# Altium PCB NORA_V0.01.PcbDoc (part 1 of 3)
Units mm, origin at the board's own origin, x right, y up, seen from the top; angles counter-clockwise.
Board outline 161.42 x 170.81 mm, 2 copper layers (Top Layer, Bottom Layer), stack 1.671 mm thick; 329 components, 221 nets, 903 pads, 560 vias.
Unrouted connection lines stored in the file: 1.
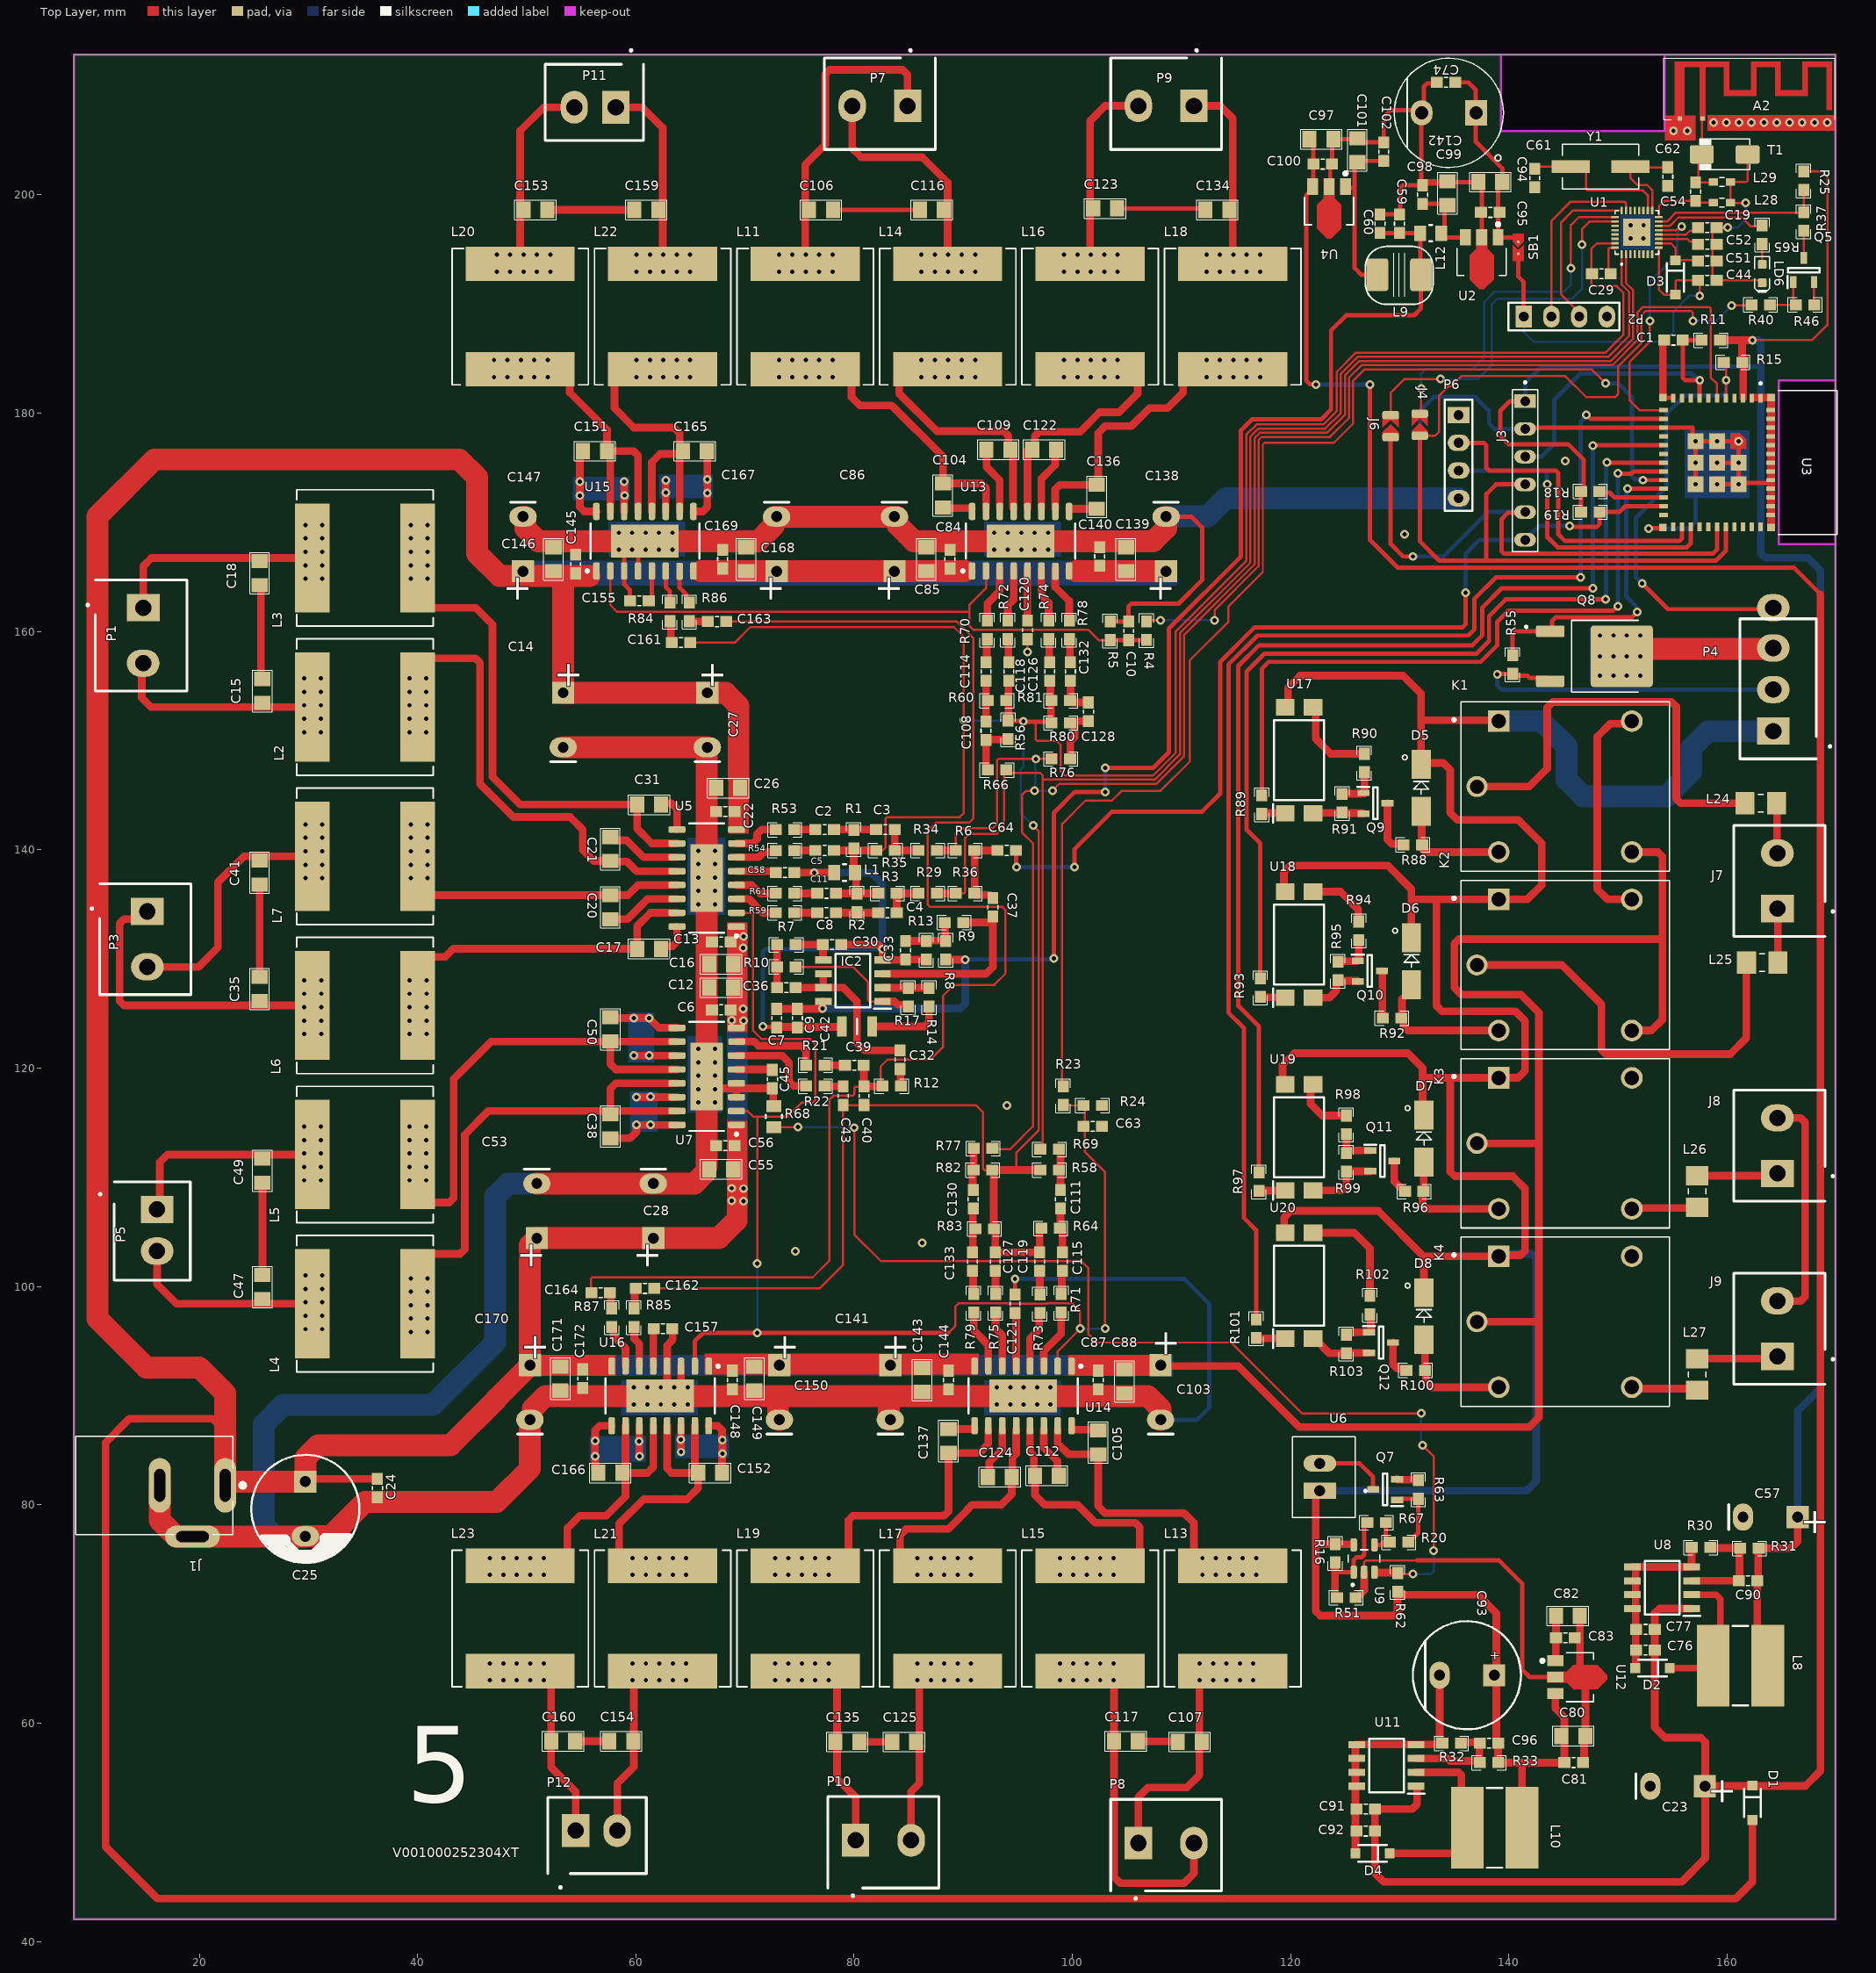
[diagram p0: Top Layer view]
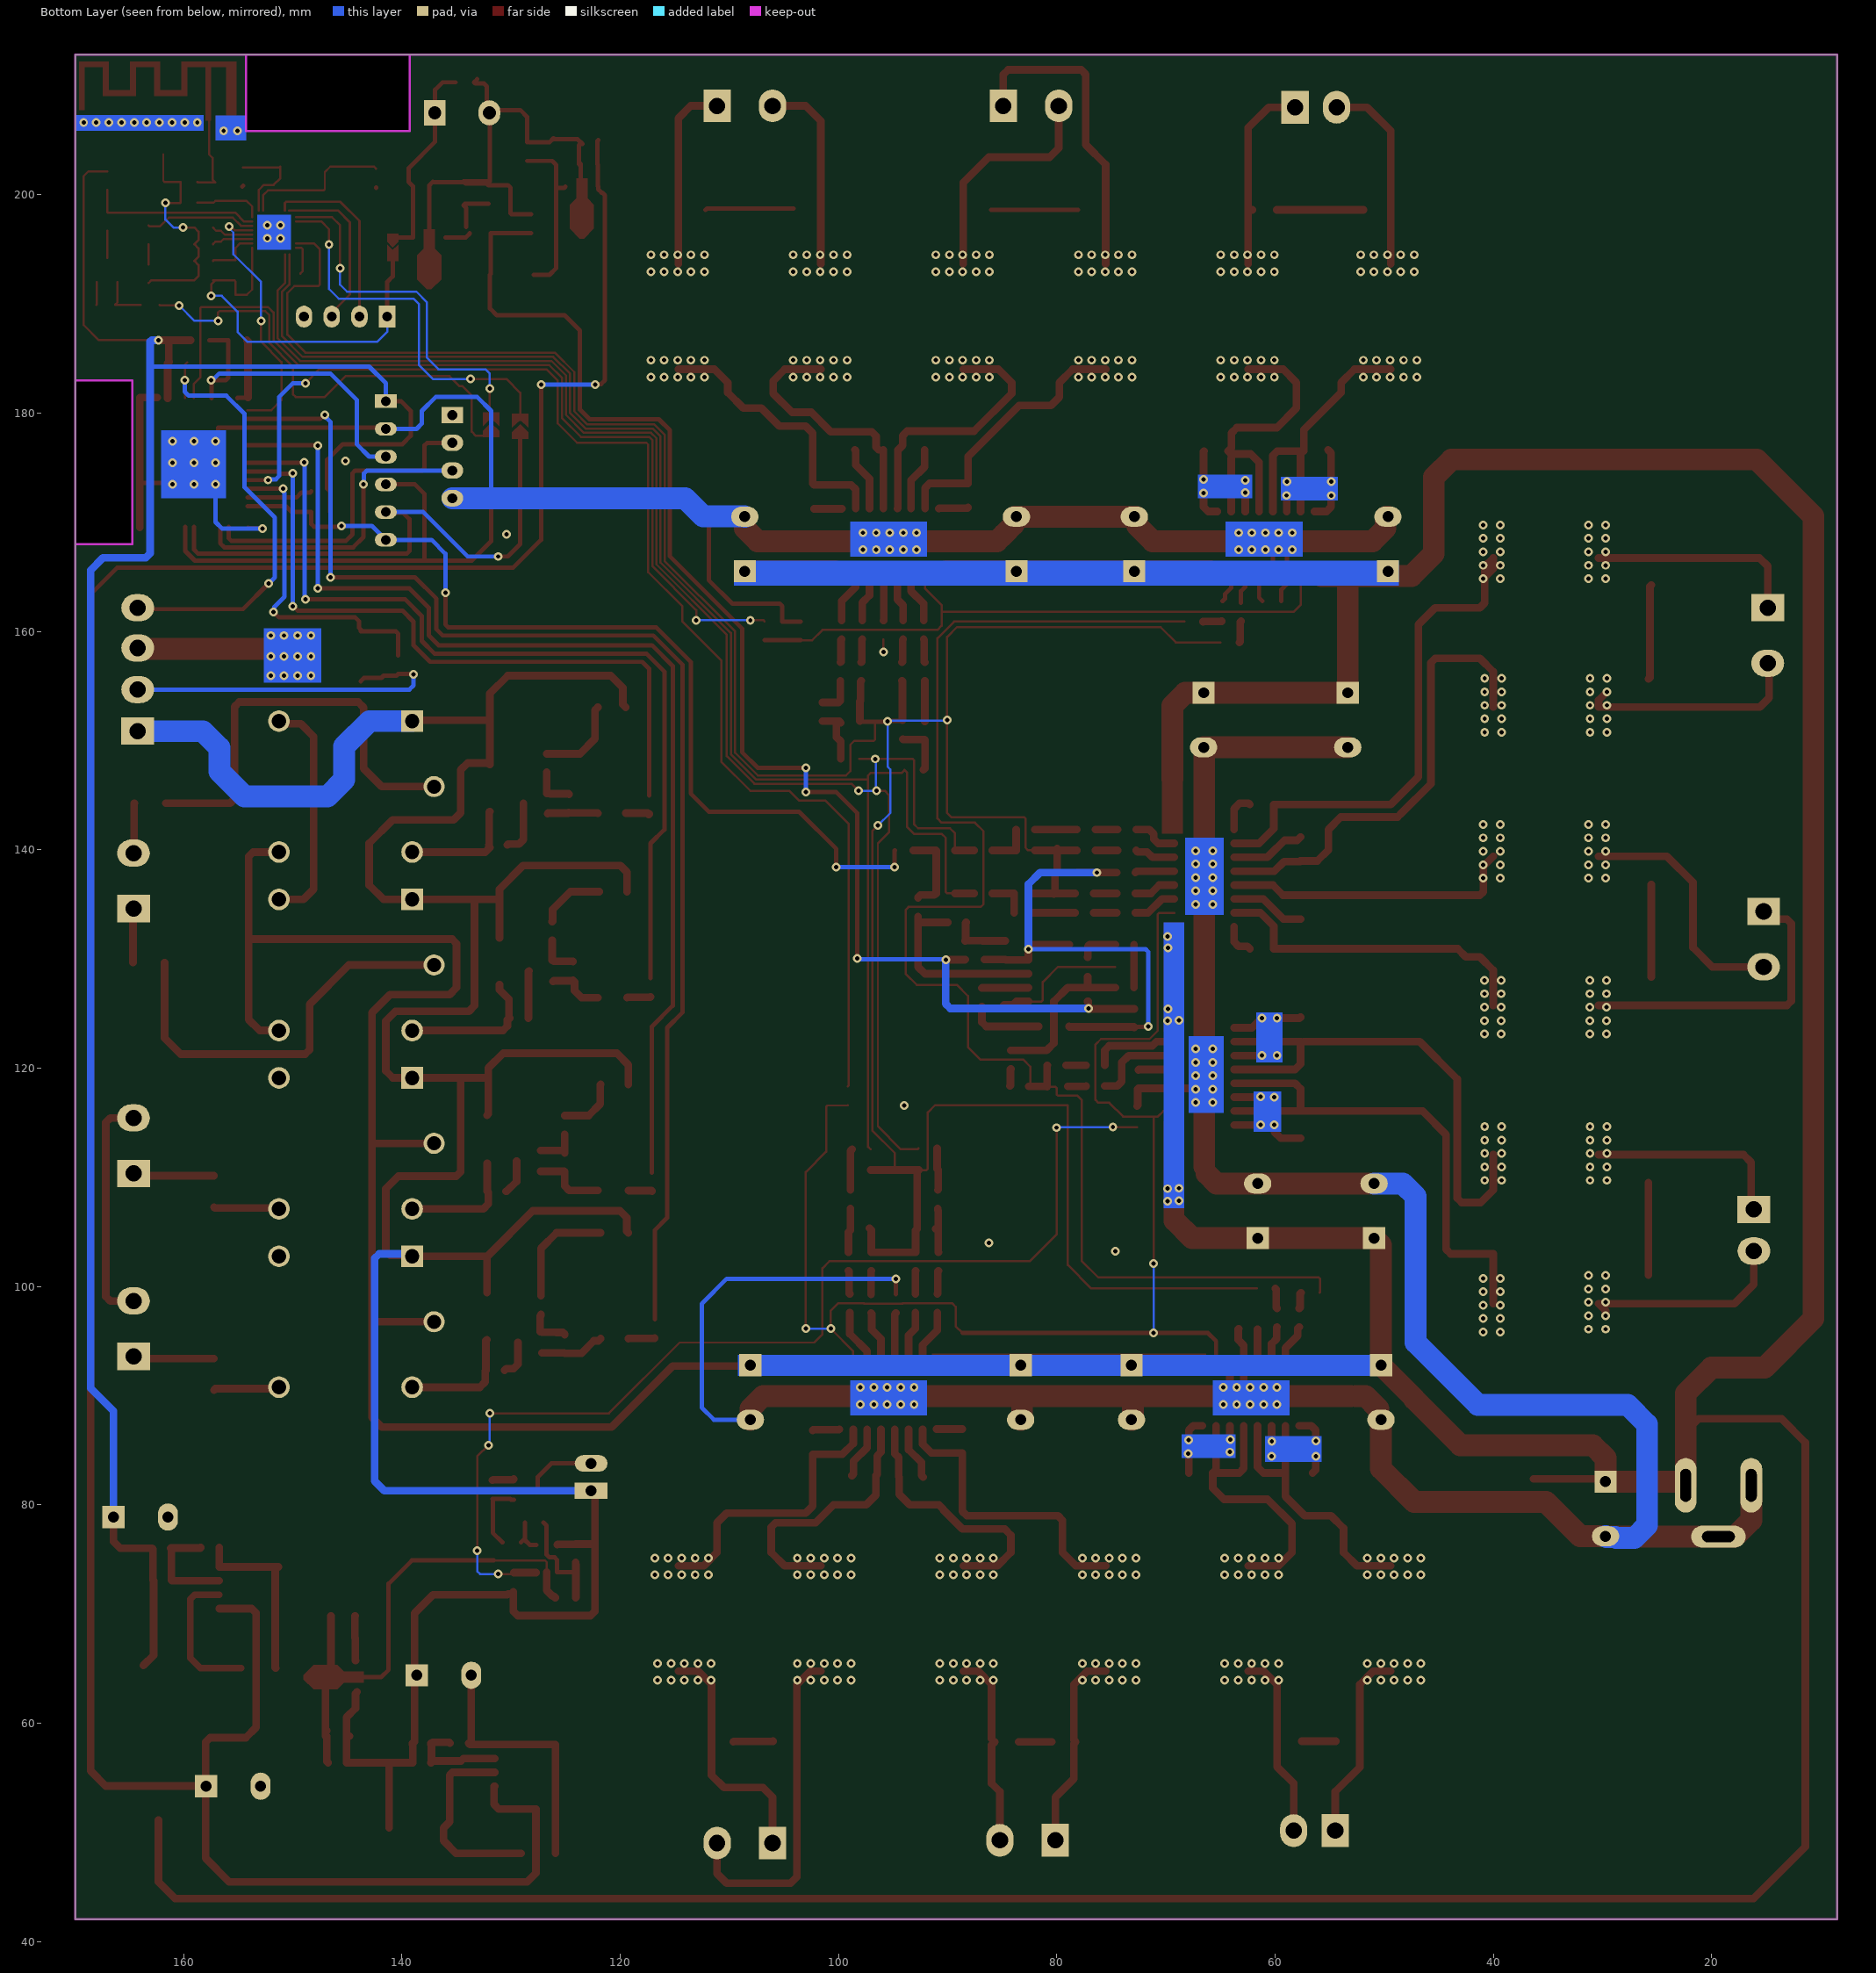
[diagram p1: Bottom Layer view, seen from below]
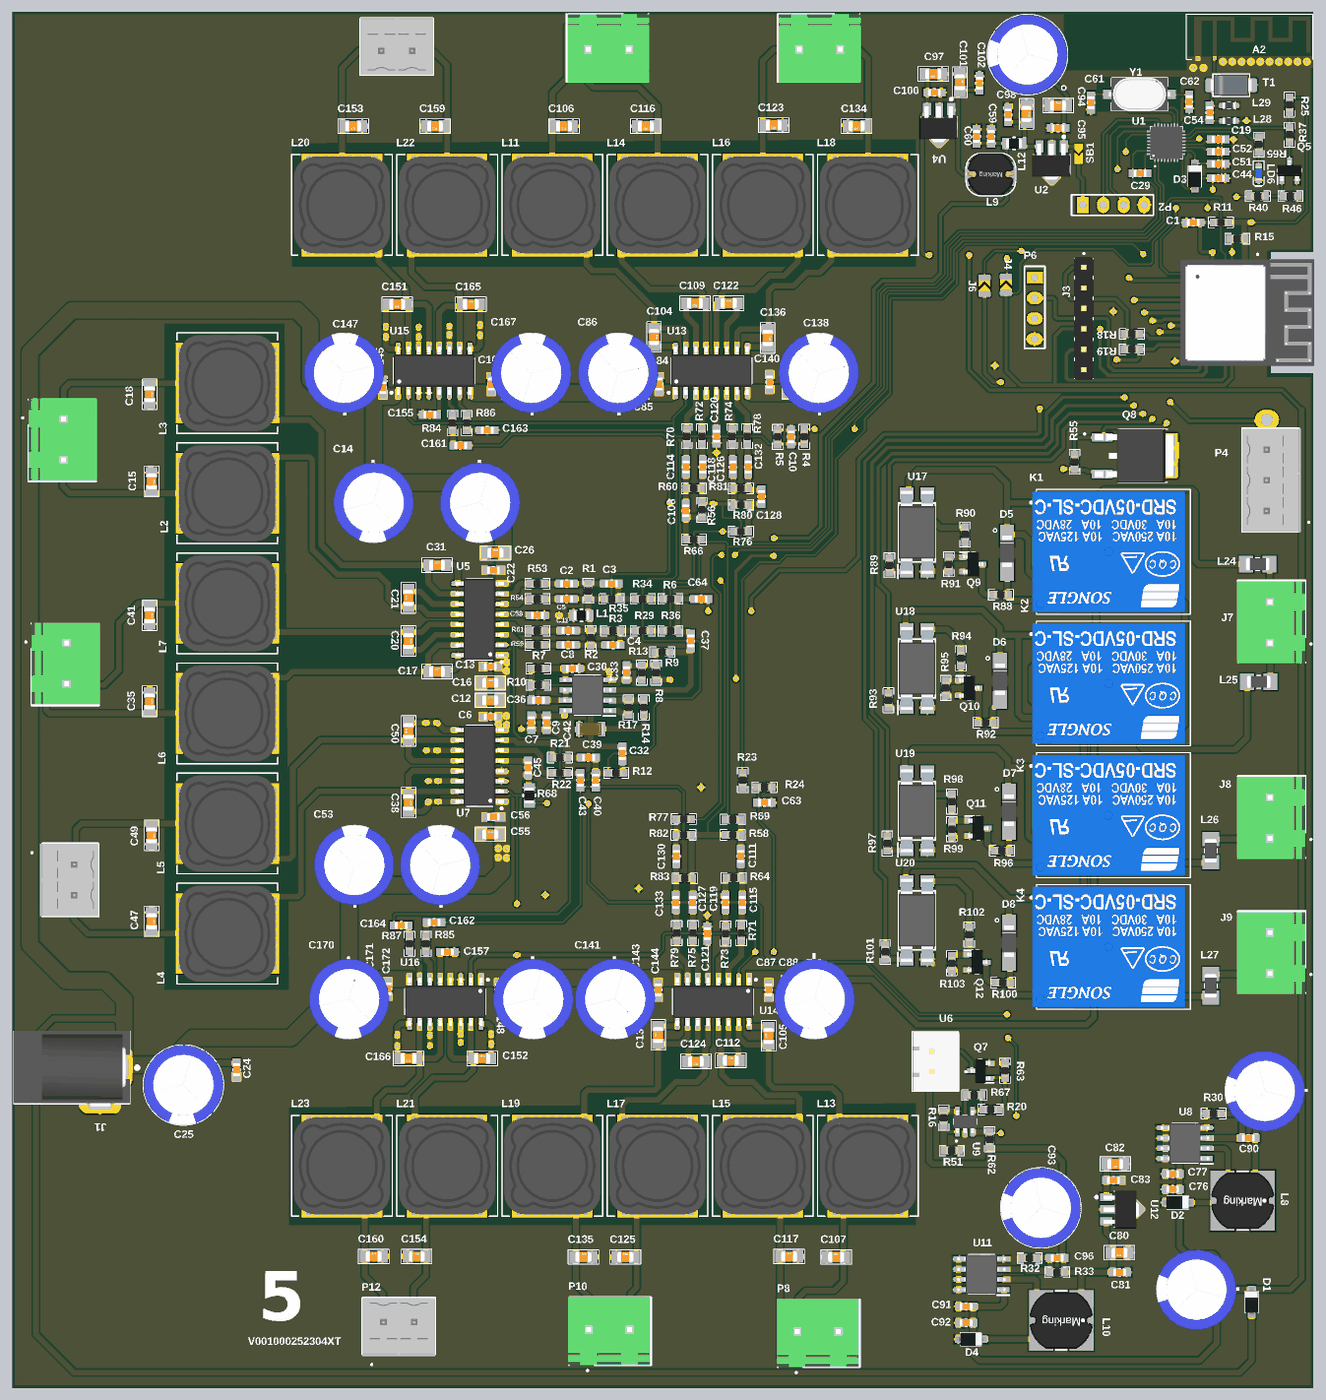
[diagram p4: 3D render of the assembled board from above, using the file's embedded part models]

## Layer stack, top to bottom
Top Solder: solder mask 0.0102, Solder Resist, Dk 3.5
Top Layer: signal copper 0.0356
Dielectric 1: dielectric 1.6, FR-4, Dk 1.6
Bottom Layer: signal copper 0.0356
Bottom Solder: solder mask 0.0102, Solder Resist, Dk 3.5

## Board outline
8.509,42.037 169.926,42.037 169.926,212.852 8.509,212.852
cut-out: 164.719,168.007 164.719,183.007 169.926,183.007 169.926,168.007
cut-out: 139.281,205.867 139.281,212.852 154.281,212.852 154.281,205.867

## Design rules (kind name [scope] priority, off if disabled: settings)
Clearance [All] p1: gap=0.2 ignorepadtopadclearanceinfootprint=FALSE except(0.18: Arc-Arc Arc-Track Arc-SMDPad Track-Track Track-SMDPad SMDPad-SMDPad)
FanoutControl Fanout_Default [All] p1: bgadir=Out bgaviamode=Centered fanoutstyle=Auto fanoutdirection=Alternating viagrid=0.025 // Fanout_Default (Default Rule)
FanoutControl Fanout_Small [(CompPinCount < 5)] p2: bgadir=Out bgaviamode=Centered fanoutstyle=Auto fanoutdirection=OutThenIn viagrid=0.025 // Fanout_Small (Default Rule)
FanoutControl Fanout_LCC [IsLCC] p4: bgadir=Out bgaviamode=Centered fanoutstyle=Auto fanoutdirection=Alternating viagrid=0.025 // Fanout_LCC (Default Rule)
FanoutControl Fanout_BGA [IsBGA] p5: bgadir=Out bgaviamode=Centered fanoutstyle=Auto fanoutdirection=Alternating viagrid=0.025 // Fanout_BGA (Default Rule)
PolygonConnect [All] p1: connectstyle=Relief reliefconductorwidth=0.254 reliefentries=4 polygonreliefangle="90 Angle" airgapwidth=0.254
RoutingVias [All] p1: holewidth=0.4 width=0.8 viastyle="Through Hole" minholewidth=0.4 minwidth=0.8 maxholewidth=0.4 maxwidth=0.8
SolderMaskExpansion [All] p1: expansion=0.102 istentingtop=FALSE
Width [All] p1: maxlimit=2 minlimit=0.2 preferedwidth=0.4
26 further rules are at their usual default settings.

## Classes and differential pairs
component class TouchORkey: C1 C64 D5 D6 D7 D8 J3 J7 J8 J9 jc K1 K2 K3 K4 L24 L25 L26 L27 P4 P6 Q5 Q8 Q9 Q10 Q11 Q12 R11 R15 R18 R19 R25 R37 R40 R46 R55 R88 R89 R90 R91 R92 R93 R94 R95 R96 R97 R98 R99 R100 R101 R102 R103 U3 U17 U18 U19 U20
component class Amplifier: C2 C3 C4 C5 C6 C7 C8 C9 C10 C11 C12 C13 C14 C15 C16 C17 C18 C20 C21 C22 C24 C25 C26 C27 C28 C30 C31 C32 C33 C35 C36 C37 C38 C39 C40 C41 C42 C43 C45 C47 C49 C50 C53 C55 C56 C58 C63 C84 C85 C86 C87 C88 C103 C104 C105 C106 C107 C108 C109 C111 C112 C114 C115 C116 C117 C118 C119 C120 C121 C122 C123 C124 C125 C126 C127 C128 C130 C132 C133 C134 C135 C136 C137 C138 C139 C140 C141 C143 C144 C145 C146 C147 C148 C149 C150 C151 C152 C153 C154 C155 C157 C159 C160 C161 C162 C163 C164 C165 C166 C167 C168 C169 C170 C171 C172 IC2 L1 L2 L3 L4 L5 L6 L7 L11 L13 L14 L15 L16 L17 L18 L19 L20 L21 L22 L23 P1 P3 P5 P7 P8 P9 P10 P11 P12 Q7 R1 R2 R3 R4 R5 R6 R7 R8 R9 R10 R12 R13 R14 R16 R17 R20 R21 R22 R23 R24 R29 R34 R35 R36 R51 R53 R54 R56 R58 R59 R60 R61 R62 R63 R64 R66 R67 R68 R69 R70 R71 R72 R73 R74 R75 R76 R77 R78 R79 R80 R81 R82 R83 R84 R85 R86 R87 U5 U6 u6 U7 U9 U13 U14 U15 U16
component class POWER: C23 C57 C59 C60 C74 C76 C77 C80 C81 C82 C83 C90 C91 C92 C93 C94 C95 C96 C97 C98 C99 C100 C101 C102 C142 D1 D2 D4 J1 L8 L9 L10 L12 R30 R31 R32 R33 SB1 U2 U4 u6 U8 U11 U12
component class Bluetooth: 1 A2 C19 C29 C44 C51 C52 C54 C61 C62 D3 J4 J6 L28 L29 LD6 P2 R65 T1 U1 Y1

## Components (designator, comment, footprint, x,y, rotation, side; value= is the part's Value field where it differs from the comment)
A2 "ANTENNA 2.4GHZ" "ANTENNA 2.4GHZ - TI" 157.684,206.81 r0 top
C1 "1u" cap0603 155.067,186.69 r0 top value=104
C2 "2.2u" cap0603 77.3,141.854 r180 top
C3 "100n" cap0603 82.859,141.859 r0 top value=104
C4 "100n" cap0603 83.058,134.239 r0 top value=104
C5 "2.2u" cap0603 77.3,139.954 r0 top
C6 "100n" cap0603 67.818,125.349 r180 top
C7 "100n" cap0603 72.898,124.587 r90 top
C8 "2.2u" cap0603 77.47,134.239 r0 top
C9 "10u" cap0603 74.803,124.587 r270 top value=104
C10 "2.2u" cap0603 105.151,160.063 r270 top value=104
C11 "2.2u" cap0603 77.47,136.017 r0 top
C12 "10u" "CAP 0805" 67.818,127.381 r0 top value=104
C13 "100n" cap0603 67.818,131.572 r180 top
C14 "1000u/25v" "CAP DIP 10*13" 53.34,151.892 r0 top
C15 "1u" "CAP 0805" 25.781,154.559 r270 top value=104
C16 "10u" "CAP 0805" 67.818,129.54 r0 top value=104
C17 "1u" "CAP 0805" 61.214,130.937 r0 top value=104
C18 "1u" "CAP 0805" 25.527,165.354 r270 top value=104
C19 "1u" cap0603 158.171,197.004 r0 top value=104
C20 "1u" "CAP 0805" 57.658,134.747 r270 top value=104
C21 "1u" "CAP 0805" 57.658,140.081 r90 top value=104
C22 "100n" cap0603 68.199,143.51 r180 top
C23 "1000u/25v" "CAP DIP 10*13" 155.448,54.229 r270 top
C24 "1u" cap0603 36.322,81.534 r270 top
C25 "1000u/25v" "CAP DIP 10*13" 29.718,79.629 r0 top
C26 "10u" "CAP 0805" 68.453,145.669 r0 top value=104
C27 "1000u/25v" "CAP DIP 10*13" 66.548,151.892 r0 top
C28 "1000u/25v" "CAP DIP 10*13" 61.595,106.934 r180 top
C29 "1u" cap0603 148.463,192.786 r180 top value=104
C30 "10n" cap0603 77.978,131.318 r180 top
C31 "1u" "CAP 0805" 61.214,144.145 r0 top value=104
C32 "470n" cap0603 84.201,120.777 r270 top
C33 "4.7u" cap0603 84.709,130.81 r90 top value=104
C35 "1u" "CAP 0805" 25.527,127.254 r270 top value=104
C36 "22n" cap0603 73.787,127.381 r180 top
C37 "4.7u" cap0603 92.71,134.747 r90 top value=104
C38 "1u" "CAP 0805" 57.669,114.681 r270 top value=104
C39 "2.2u" cap0603 80.01,120.269 r0 top
C40 "1n" cap0603 80.899,117.475 r90 top
C41 "1u" "CAP 0805" 25.527,137.922 r270 top value=104
C42 "10u" "CAP 1206" 80.264,123.825 r0 top value=104
C43 "2.2u" cap0603 78.994,117.475 r270 top
C44 "1u" cap0603 158.171,192.178 r0 top value=104
C45 "1u" cap0603 72.517,118.999 r90 top
C47 "1u" "CAP 0805" 25.781,99.949 r270 top value=104
C49 "1u" "CAP 0805" 25.781,110.617 r270 top value=104
C50 "1u" "CAP 0805" 57.669,123.571 r90 top value=104
C51 "1u" cap0603 158.171,193.956 r0 top value=104
C52 "1u" cap0603 158.171,195.48 r0 top value=104
C53 "1000u/25v" "CAP DIP 10*13" 50.927,106.934 r180 top
C54 "2.7p" cap0603 157.099,200.298 r270 top value=104
C55 "10u" "CAP 0805" 67.818,110.744 r0 top value=104
C56 "100n" cap0603 68.199,112.903 r180 top
C57 "1000u/25v" "CAP DIP 10*13" 163.94,78.886 r270 top
C58 "1u" cap0603 73.66,137.922 r180 top
C59 "100n" cap0603 129.959,197.358 r270 top value=104
C60 "100n" cap0603 128.181,197.358 r270 top value=104
C61 "NC" cap0603 142.367,201.549 r90 top value=104
C62 "NC" cap0603 154.559,201.676 r270 top value=104
C63 "2.2u" cap0603 101.854,114.681 r180 top value=104
C64 "1u" cap0603 93.98,139.954 r180 top value=104
C74 "1u" cap0603 134.239,210.312 r0 top value=104
C76 "100n" cap0603 152.51,66.694 r0 top value=104
C77 "100n" cap0603 152.51,68.599 r0 top value=104
C80 "10u" "CAP 0805" 145.906,58.82 r180 top value=104
C81 "100n" cap0603 145.923,56.388 r180 top value=104
C82 "10u" "CAP 0805" 145.396,69.833 r180 top value=104
C83 "100n" cap0603 145.161,67.818 r180 top value=104
C84 "100n" cap0603 88.773,166.624 r90 top
C85 "10u" "CAP 0805" 86.614,166.624 r270 top value=104
C86 "1000u/25v" "CAP DIP 10*13" 83.693,168.021 r180 top locked
C87 "100n" cap0603 102.362,91.44 r270 top
C88 "10u" "CAP 0805" 104.775,91.313 r90 top value=104
C90 "100n" cap0603 161.908,73.044 r180 top value=104
C91 "100n" cap0603 126.873,52.146 r0 top value=104
C92 "100n" cap0603 126.873,50.114 r0 top value=104
C93 "1000u/25v" "CAP DIP 10*13" 136.144,64.389 r270 top
C94 "10u" "CAP 0805" 138.286,201.187 r0 top value=104
C95 "100n" cap0603 138.286,198.393 r0 top value=104
C96 "100n" cap0603 138.176,58.166 r180 top value=104
C97 "10u" "CAP 0805" 122.809,205.105 r180 top value=104
C98 "100n" cap0603 132.08,200.025 r270 top value=104
C99 "10u" "CAP 0805" 134.366,200.152 r270 top value=104
C100 "100n" cap0603 122.936,202.819 r180 top value=104
C101 "10u" "CAP 0805" 126.111,204.089 r270 top value=104
C102 "100n" cap0603 128.524,203.962 r270 top value=104
C103 "1000u/25v" "CAP DIP 10*13" 108.077,90.297 r0 top locked
C104 "1u" "CAP 0805" 88.138,172.466 r270 top value=104
C105 "1u" "CAP 0805" 102.362,85.725 r90 top value=104
C106 "1u" "CAP 0805" 76.962,198.628 r180 top value=104
C107 "1u" "CAP 0805" 110.744,58.293 r0 top value=104
C108 "100n" cap0603 92.075,150.905 r270 top value=104
C109 "1u" "CAP 0805" 93.218,176.657 r180 top value=104
C111 "100n" cap0603 98.905,108.006 r90 top value=104
C112 "1u" "CAP 0805" 97.663,82.677 r0 top value=104
C114 "2.2u" cap0603 92.093,156.337 r270 top
C115 "2.2u" cap0603 99.082,102.291 r90 top
C116 "1u" "CAP 0805" 87.122,198.628 r180 top value=104
C117 "1u" "CAP 0805" 104.902,58.349 r0 top value=104
C118 "2.2u" cap0603 94.184,156.337 r270 top
C119 "2.2u" cap0603 97,102.291 r90 top
C120 "1u" cap0603 95.885,160.147 r90 top
C121 "1u" cap0603 94.742,98.425 r270 top
C122 "1u" "CAP 0805" 97.409,176.657 r0 top value=104
C123 "1u" "CAP 0805" 102.997,198.755 r180 top value=104
C124 "1u" "CAP 0805" 93.345,82.55 r180 top value=104
C125 "1u" "CAP 0805" 84.582,58.293 r0 top value=104
C126 "2.2u" cap0603 97.917,156.337 r270 top
C127 "2.2u" cap0603 92.936,102.291 r90 top
C128 "100n" cap0603 101.473,152.654 r270 top value=104
C130 "100n" cap0603 90.904,108.006 r90 top value=104
C132 "2.2u" cap0603 99.822,156.337 r90 top
C133 "2.2u" cap0603 90.845,102.291 r270 top
C134 "1u" "CAP 0805" 113.284,198.628 r180 top value=104
C135 "1u" "CAP 0805" 79.375,58.293 r0 top value=104
C136 "1u" "CAP 0805" 102.235,172.339 r270 top value=104
C137 "1u" "CAP 0805" 88.646,85.852 r90 top value=104
C138 "1000u/25v" "CAP DIP 10*13" 108.585,168.021 r180 top locked
C139 "10u" "CAP 0805" 104.902,166.624 r270 top value=104
C140 "100n" cap0603 102.489,166.878 r90 top
C141 "1000u/25v" "CAP DIP 10*13" 83.312,90.297 r0 top locked
C142 "1000U" "cap  dip 10*20" 134.493,207.518 r180 top
C143 "10u" "CAP 0805" 86.233,91.44 r90 top value=104
C144 "100n" cap0603 88.646,91.44 r270 top
C145 "100n" cap0603 54.483,166.176 r90 top
C146 "10u" "CAP 0805" 52.451,166.624 r270 top value=104
C147 "1000u/25v" "CAP DIP 10*13" 49.657,168.021 r180 top locked
C148 "100n" cap0603 68.834,91.44 r270 top
C149 "10u" "CAP 0805" 70.866,91.567 r90 top value=104
C150 "1000u/25v" "CAP DIP 10*13" 73.152,90.297 r0 top locked
C151 "1u" "CAP 0805" 56.261,176.53 r180 top value=104
C152 "1u" "CAP 0805" 66.802,82.931 r0 top value=104
C153 "1u" "CAP 0805" 50.8,198.628 r180 top value=104
C154 "1u" "CAP 0805" 58.674,58.349 r0 top value=104
C155 "1u" cap0603 60.325,162.814 r0 top
C157 "1u" cap0603 62.484,96.139 r180 top
C159 "1u" "CAP 0805" 60.96,198.628 r180 top value=104
C160 "1u" "CAP 0805" 53.34,58.349 r0 top value=104
C161 "2.2u" cap0603 64.135,159.004 r0 top
C162 "2.2u" cap0603 60.833,99.822 r0 top
C163 "2.2u" cap0603 67.437,160.909 r0 top
C164 "2.2u" cap0603 56.769,99.441 r180 top
C165 "1u" "CAP 0805" 65.405,176.53 r0 top value=104
C166 "1u" "CAP 0805" 57.658,82.931 r180 top value=104
C167 "1000u/25v" "CAP DIP 10*13" 72.898,168.021 r180 top locked
C168 "10u" "CAP 0805" 70.104,166.624 r270 top value=104
C169 "100n" cap0603 67.945,166.624 r90 top
C170 "1000u/25v" "CAP DIP 10*13" 50.292,90.297 r0 top locked
C171 "10u" "CAP 0805" 53.086,91.567 r90 top value=104
C172 "100n" cap0603 55.118,91.567 r270 top
D1 "1N5819(SOD123)" "1N5819 SOD-123" 162.306,52.705 r270 top
D2 "1N5819(SOD123)" "1N5819 SOD-123" 153.145,65.043 r180 top
D3 "1N4148" "1N4148 SOD-123" 155.25,192.432 r90 top
D4 "1N5819(SOD123)" "1N5819 SOD-123" 127.498,48.082 r180 top
D5 "sh_diod" SH_diod 131.953,145.669 r90 top
D6 "sh_diod" SH_diod 131.064,129.794 r90 top
D7 "sh_diod" SH_diod 132.207,113.538 r90 top
D8 "sh_diod" SH_diod 132.207,97.282 r90 top
IC2 "RC4558DR" RC4558 79.883,128.016 r180 top
J1 "Power jack" "Power jack" 15.875,81.788 r180 top
J3 "NC" "pin header1*6" 141.478,181.102 r270 top
J4 "SOLDERJUMPER" SOLDERJUMPER_ARROW_NOPASTE 131.826,178.943 r90 top
J6 "SOLDERJUMPER" SOLDERJUMPER_ARROW_NOPASTE 129.159,178.816 r90 top
J7 "Header 2" CONN-PHOENIX-5.08 164.592,137.033 r90 top
J8 "Header 2" CONN-PHOENIX-5.08 164.592,112.776 r90 top
J9 "Header 2" CONN-PHOENIX-5.08 164.592,96.012 r90 top
K1 "SRD-12VDC-SL-C" RELAY_SRD-05VDC-SL-C_SRD-05VDC-SL-C(Primary) 145.161,145.799 r0 top
K2 "SRD-12VDC-SL-C" RELAY_SRD-05VDC-SL-C_SRD-05VDC-SL-C(Primary) 145.161,129.457 r0 top
K3 "SRD-12VDC-SL-C" RELAY_SRD-05VDC-SL-C_SRD-05VDC-SL-C(Primary) 145.161,113.116 r0 top
K4 "SRD-12VDC-SL-C" RELAY_SRD-05VDC-SL-C_SRD-05VDC-SL-C(Primary) 145.161,96.774 r0 top
L1 "Ferrite-0805" Ferrite-0805 79.121,137.922 r180 top
L2 "10uH, 12*12" "inductor 12*12" 35.179,153.08 r0 top
L3 "10uH, 12*12" "inductor 12*12" 35.179,166.744 r0 top
L4 "10uH, 12*12" "inductor 12*12" 35.179,98.425 r0 top
L5 "10uH, 12*12" "inductor 12*12" 35.179,112.089 r0 top
L6 "10uH, 12*12" "inductor 12*12" 35.179,125.752 r0 top
L7 "10uH, 12*12" "inductor 12*12" 35.179,139.416 r0 top
L8 "33uH, 8*7" "Inductor 8*7" 161.203,65.278 r180 top
L9 "33uH, 5.3*6.3" "Inductor SMD 5.3x6.3mm" 129.936,192.678 r180 top
L10 "33uH, 8*7" "Inductor 8*7" 138.684,50.419 r180 top
L11 "10uH, 12*12" "inductor 12*12" 75.514,188.849 r270 top
L12 "Ferrite-0805" Ferrite-0805 132.825,196.488 r0 top
L13 "10uH, 12*12" "inductor 12*12" 114.681,69.596 r90 top
L14 "10uH, 12*12" "inductor 12*12" 88.57,188.849 r270 top
L15 "10uH, 12*12" "inductor 12*12" 101.625,69.596 r90 top
L16 "10uH, 12*12" "inductor 12*12" 101.625,188.849 r270 top
L17 "10uH, 12*12" "inductor 12*12" 88.57,69.596 r90 top
L18 "10uH, 12*12" "inductor 12*12" 114.681,188.849 r270 top
L19 "10uH, 12*12" "inductor 12*12" 75.514,69.596 r90 top
L20 "10uH, 12*12" "inductor 12*12" 49.403,188.849 r270 top
L21 "10uH, 12*12" "inductor 12*12" 62.459,69.596 r90 top
L22 "10uH, 12*12" "inductor 12*12" 62.459,188.849 r270 top
L23 "10uH, 12*12" "inductor 12*12" 49.403,69.596 r90 top
L24 "Ferrite-1206" "FERRITE 1206" 163.068,144.272 r180 top
L25 "Ferrite-1206" "FERRITE 1206" 163.195,129.667 r180 top
L26 "Ferrite-1206" "FERRITE 1206" 157.226,108.712 r270 top
L27 "Ferrite-1206" "FERRITE 1206" 157.226,91.948 r270 top
L28 "NC" "inductor 0603" 159.512,199.282 r0 top
L29 "NC" "inductor 0603" 159.512,201.187 r0 top
LD6 "LED, White" LED-0603-BLUE 163.195,192.786 r270 top
P1 "Header 2" CONN-PHOENIX-5.08 14.859,159.766 r270 top
P2 "SWD" HDR1X4H 141.351,188.849 r0 top
P3 "Header 2" CONN-PHOENIX-5.08 15.24,131.953 r270 top
P4 "Header 3Pin" "CONN-PHOENIX-3.81 3Pin" 164.211,154.686 r90 top
P5 "Header 2" CONN-PHOENIX-3.81 16.002,105.156 r270 top
P6 "SWD" HDR1X4H 135.382,179.832 r270 top
P7 "Header 2" CONN-PHOENIX-5.08 82.486,208.153 r180 top
P8 "Header 2" CONN-PHOENIX-5.08 108.458,49.022 r0 top
P9 "Header 2" CONN-PHOENIX-5.08 108.712,208.153 r180 top
P10 "Header 2" CONN-PHOENIX-5.08 82.55,49.276 r0 top
P11 "Header 2" CONN-PHOENIX-3.81 56.261,208.153 r180 top
P12 "Header 2" CONN-PHOENIX-3.81 56.388,50.038 r0 top
Q5 "BC817" "BJT SS805" 167.005,193.113 r90 top
Q7 "BC817" BC817 128.651,81.407 r180 top
Q8 "M9003B BJT" "M9003 BJT" 147.828,157.734 r0 top
Q9 "BC817" BC817 127.762,144.272 r0 top
Q10 "BC817" BC817 127.254,128.905 r0 top
Q11 "BC817" BC817 128.397,111.506 r0 top
Q12 "BC817" BC817 128.27,94.869 r0 top
R1 "NC" RES-0603 79.967,140.97 r90 top value=3.3k
R2 "NC" RES-0603 80.264,135.128 r270 top value=3.3k
R3 "NC" RES-0603 83.058,136.017 r180 top value=3.3k
R4 "33k" RES-0603 106.783,160.082 r90 top
R5 "22K" RES-0603 103.462,160.063 r270 top
R6 "27K" RES-0603 90.17,139.954 r0 top
R7 "10k" RES-0603 73.787,131.318 r180 top
R8 "3.3k" RES-0603 88.392,130.81 r90 top
R9 "47k" RES-0603 89.154,133.35 r180 top
R10 "10k" RES-0603 73.787,129.286 r180 top
R11 "10k" RES-0603 158.496,186.69 r0 top
R12 "10k" RES-0603 83.439,118.364 r0 top
R13 "2.2k" RES-0603 86.614,130.81 r270 top
R14 "2.2k" RES-0603 86.868,126.492 r270 top
R15 "10k" RES-0603 160.528,184.658 r0 top
R16 "10k" RES-0603 124.079,75.565 r270 top
R17 "3.3k" RES-0603 84.963,126.492 r270 top
R18 "10k" RES-0603 147.447,172.847 r0 top
R19 "10k" RES-0603 147.447,170.942 r180 top
R20 "1k" RES-0603 129.921,76.581 r180 top
R21 "0R" RES-0603 76.454,120.269 r0 top
R22 "0R" RES-0603 76.454,118.364 r0 top
R23 "33K" RES-0603 99.149,117.475 r90 top
R24 "22K" RES-0603 101.854,116.586 r180 top
R25 "22K" RES-0603 167.005,201.295 r90 top
R29 "0R" RES-0603 86.741,136.017 r180 top value=3.3k
R30 "3.3k" RES-0603 157.59,76.092 r180 top
R31 "5.6k" RES-0603 162.035,76.016 r180 top
R32 "1k" RES-0603 134.747,58.166 r180 top
R33 "9.1k" RES-0603 138.176,56.388 r180 top
R34 "0R" RES-0603 86.741,139.954 r180 top value=3.3k
R35 "NC" RES-0603 82.877,139.954 r0 top value=3.3k
R36 "27K" RES-0603 90.17,136.017 r180 top
R37 "22k" RES-0603 167.005,197.558 r270 top
R40 "1k" RES-0603 163.068,189.938 r0 top
R46 "4.7K" RES-0603 167.132,189.938 r180 top
R51 "1k" RES-0603 125.095,71.501 r0 top
R53 "0R" RES-0603 73.66,141.854 r0 top
R54 "0R" RES-0603 73.66,139.949 r0 top
R55 "NC" RES-0603 140.335,156.972 r270 top
R56 "NC" RES-0603 94.107,151.003 r90 top value=3.3k
R58 "NC" RES-0603 97.907,110.673 r180 top value=3.3k
R59 "0R" RES-0603 73.66,134.239 r0 top
R60 "NC" RES-0603 93.091,153.67 r180 top value=3.3k
R61 "0R" RES-0603 73.66,136.017 r0 top
R62 "10k" RES-0603 129.794,72.898 r90 top
R63 "4.7k" RES-0603 131.699,81.407 r270 top
R64 "NC" RES-0603 98.016,105.339 r0 top value=3.3k
R65 "1k" RES-0603 163.195,196.342 r90 top
R66 "0R" RES-0603 93.091,147.32 r180 top value=3.3k
R67 "22k" RES-0603 127.872,78.378 r180 top
R68 "NTC 10K" RES-0805 72.644,115.57 r90 top
R69 "0R" RES-0603 97.907,112.578 r0 top value=3.3k
R70 "0R" RES-0603 92.202,160.147 r270 top
R71 "0R" RES-0603 98.973,98.476 r90 top
R72 "0R" RES-0603 94.075,160.147 r270 top
R73 "0R" RES-0603 97.028,98.425 r90 top
R74 "0R" RES-0603 97.822,160.147 r270 top
R75 "0R" RES-0603 92.954,98.476 r90 top
R76 "0R" RES-0603 98.933,148.336 r0 top value=3.3k
R77 "0R" RES-0603 91.821,112.649 r180 top value=3.3k
R78 "0R" RES-0603 99.713,160.147 r270 top
R79 "0R" RES-0603 90.954,98.476 r90 top
R80 "NC" RES-0603 98.933,151.638 r0 top value=3.3k
R81 "NC" RES-0603 98.933,153.67 r0 top value=3.3k
R82 "NC" RES-0603 91.793,110.673 r180 top value=3.3k
R83 "NC" RES-0603 91.948,105.283 r180 top value=3.3k
R84 "0R" RES-0603 63.119,161.798 r270 top
R85 "0R" RES-0603 59.817,97.155 r90 top
R86 "0R" RES-0603 64.897,161.798 r270 top
R87 "0R" RES-0603 57.785,97.155 r90 top
R88 "3.3k" RES-0603 131.191,140.462 r180 top
R89 "3.3k" RES-0603 117.348,144.145 r90 top
R90 "3.3k" RES-0603 126.746,147.955 r90 top
R91 "10k" RES-0603 124.714,144.272 r270 top
R92 "3.3k" RES-0603 129.286,124.587 r180 top
R93 "3.3k" RES-0603 117.221,127.381 r90 top
R94 "3.3k" RES-0603 126.238,132.588 r90 top
R95 "10k" RES-0603 124.333,128.905 r270 top
R96 "3.3k" RES-0603 131.318,108.712 r180 top
R97 "3.3k" RES-0603 117.094,109.601 r90 top
R98 "3.3k" RES-0603 125.095,114.808 r90 top
R99 "10k" RES-0603 125.095,111.379 r270 top
R100 "3.3k" RES-0603 131.445,92.329 r180 top
R101 "3.3k" RES-0603 116.84,96.139 r90 top
R102 "3.3k" RES-0603 127.254,98.298 r90 top
R103 "10k" RES-0603 125.095,94.742 r270 top
SB1 "jumper" JP2_SMD 140.843,195.199 r270 top
T1 "BioDirectional TVS Diod" SMAJ3.3A 159.766,203.708 r0 top
U1 "JL7016C" JL7016C 151.721,196.569 r90 top
U2 "78L05" 78L05 137.5,194.107 r180 top
U3 "ESP32-C3-MINI-1-N4" ESP32-C3-MINI-1 161.757,175.476 r270 top
U4 "78L12" 78L05 123.516,198.759 r180 top
U5 "CS8673E" CS8673E 66.49,137.414 r180 top
U6 "FAN_12V" "FAN_Connector XH" 122.14,82.549 r90 top
U7 "CS8673E" CS8673E 66.49,119.253 r180 top
U8 "XL1509-12E" FR9886 154.034,72.409 r180 top
U9 "LM321" LM321 126.727,75.085 r90 top
U11 "XL1509-05E" FR9886 128.778,56.134 r180 top
U12 "78L05" 78L05 146.253,64.221 r270 top
U13 "CS8673E" CS8673E 95.25,168.275 r90 top
U14 "CS8673E" CS8673E 95.476,89.974 r270 top
U15 "CS8673E" CS8673E 60.833,168.275 r90 top
U16 "CS8673E" CS8673E 62.23,89.974 r270 top
U17 "EL817" EL817 120.777,148.209 r90 top
U18 "EL817" EL817 120.777,131.318 r90 top
U19 "EL817" EL817 120.777,113.665 r90 top
U20 "EL817" EL817 120.777,100.076 r90 top
Y1 "24MHZ" "crystal b" 148.392,202.592 r180 top

## Footprints (in the part's own frame and the unit in brackets; to place one, negate y for a bottom-side part, rotate by r counter-clockwise, add the part's x,y. Pads: shape width x height; smd on the part's side, far side on the other; paste and mask are expansions set on the pad)
"1N4148 SOD-123" [mm]
  rect 0.9x0.95 smd: 1(-1.575,0) 2(1.575,0)
  silkscreen extent -1.3,-0.77 1.3,0.77, body extent -1.85,-0.8 1.85,0.8, height 1.28
"1N5819 SOD-123" [mm]
  rect 0.9x0.95 smd: 1(-1.575,0) 2(1.575,0)
  silkscreen extent -1.3,-0.77 1.3,0.77, body extent -1.85,-0.8 1.85,0.8, height 1.28
78L05 [mm] "SOT-89"
  rect 1x1.5 smd: 1(-1.5,-2) 3(1.5,-2)
  rect 1x1.5 smd paste-2 mask+0: 2(0,-2)
  Top Layer region: 1.1,1.85 1.1,-0.35 0.5,-0.95 0.5,-2.75 -0.5,-2.75 -0.5,-0.95 -1.1,-0.35 -1.1,1.85 -0.2,2.75 0.2,2.75
  silkscreen extent -2.25,-3.34 2.25,1.5, body extent -2.29,-2.35 2.41,2.1, height 1.7
"ANTENNA 2.4GHZ - TI" [mm] "TI ANTENNA"
  rect 0.4x0.4 smd: 1(-2.05,0.2) 2(0.05,0.2)
  Top Layer region: 0.3,0 -0.2,0 -0.2,4.9 -1.6,4.9 -1.6,0 -2.5,0 -2.5,5.4 2.5,5.4 2.5,2.76 4.5,2.76 4.5,5.4 7.2,5.4 7.2,2.76 9.2,2.76 9.2,5.4 11.9,5.4 11.9,0.96 11.4,0.96 11.4,4.9 9.7,4.9 9.7,2.26 6.7,2.26 6.7,4.9 5,4.9 5,2.26 2,2.26 2,4.9 0.3,4.9
  silkscreen extent -3.5,0.1 12.2,5.7
BC817 [mm] "SOT23-3"
  rect 1.1x0.6 smd: 1(-1.1,0.95) 2(-1.1,-0.95) 3(1.1,0)
  silkscreen extent -1.65,-1.45 0.2,1.5, body extent -1.25,-1.5 1.25,1.5, height 1.11
"BJT SS805" [mm]
  rect 1.1x0.6 smd: 1(-1.1,0.95) 2(-1.1,-0.95) 3(1.1,0)
  silkscreen extent -1.65,-1.45 0.2,1.5, body extent -1.25,-1.5 1.25,1.5, height 1.11
cap0603 [mm]
  rect 1.1x1 smd: 1(-0.85,0) 2(0.85,0)
  silkscreen extent -0.15,-0.45 0.15,0.45, body extent -0.8,-0.45 0.8,0.45, height 0.82
"CAP 0805" [mil]
  rect 51x59 smd: 1(-43.31,0) 2(43.31,0)
  Top Layer pour cut-out: 15,35 15,-35 -15,-35 -15,35
  silkscreen extent -75,-35 75,35, body extent -39,-25 39,25, height 31
"CAP 1206" [mm]
  rect 0.9x1.82 smd: 1(-1.397,0) 2(1.397,0)
  silkscreen extent 0,-0.7 0,0.7, body extent -1.6,-0.8 1.6,0.8, height 1.8
"cap  dip 10*20" [mm] "CAP 8*13"
  rect 2x2.3 hole 1.2: 1(-2.5,0)
  oval 2x2.3 hole 1.2: 2(2.5,0)
  silkscreen extent -5,-5 5,5, body extent -5,-4.99 5,5, height 23.8
"CAP DIP 10*13" [mm] "CAP 10*13"
  rect 2.032x2.032 hole 1: 1(0,2.5)
  oval 2.5x1.829 hole 1: 2(0,-2.5)
  silkscreen extent -1.14,-3.81 1.14,-3.81, body extent -5,-5 5,5, height 13.3
CONN-PHOENIX-3.81 [mm]
  rect 2.5x3 hole 1.5: 1(-1.905,0.127)
  oval 2.5x3 hole 1.5: 2(1.905,0.127)
  silkscreen extent -4.45,-5.18 4.57,3.18, body extent -4.44,-4.07 4.57,3.18, height 9.2
"CONN-PHOENIX-3.81 3Pin" [mm]
  rect 2.5x3 hole 1.5: 1(-3.81,0)
  oval 2.5x3 hole 1.5: 2(0,0) 3(3.81,0)
  silkscreen extent -6.35,-5.31 6.48,3.05, body extent -6.41,-4.19 6.41,3.06, height 9.2
CONN-PHOENIX-5.08 [mm]
  rect 2.5x3 hole 1.5: 1(-2.413,0)
  oval 2.5x3 hole 1.5: 2(2.667,0)
  silkscreen extent -4.95,-5.18 5.21,4, body extent -5.08,-4.38 5.08,4.12, height 12
"crystal b" [mm]
  rect 3.5x1.2 smd: 1(-2.75,0) 2(2.75,0)
  silkscreen extent -3.5,-2.05 3.5,2.05, body extent -3.8,-2.05 3.8,2.05, height 2.3
CS8673E [mm] "ESOP16"
  rrect50% 1.57x0.6 smd paste-1: 1(-2.725,4.445) 2(-2.725,3.175) 3(-2.725,1.905) 4(-2.725,0.635) 5(-2.725,-0.632) 6(-2.725,-1.905) 7(-2.746,-3.179) 8(-2.725,-4.445) 9(2.725,-4.445) 10(2.725,-3.179) 11(2.725,-1.905) 12(2.725,-0.632) 13(2.725,0.635) 14(2.725,1.905) 15(2.725,3.175) 16(2.725,4.445)
  rect 3x6.2 smd paste-2539.97: 17(0,0)
  silkscreen extent -2.85,-5 1.6,5.42, body extent -3,-5 3,5, height 2.65
EL817 [mm]
  rect 1.5x1.7 smd: 1(-4.85,1.27) 2(-4.85,-1.27) 3(4.85,-1.27) 4(4.85,1.27)
  silkscreen extent -5.7,-2.29 3.65,2.37, body extent -5.15,-2.29 5.15,2.29, height 5
ESP32-C3-MINI-1 [mm]
  rect 0.8x0.4 smd: 1(-5.9,1.3) 2(-5.9,0.5) 3(-5.9,-0.3) 4(-5.9,-1.1) 5(-5.9,-1.9) 6(-5.9,-2.7) 7(-5.9,-3.5) 8(-5.9,-4.3) 9(-5.9,-5.1) 10(-5.9,-5.9) 11(-5.9,-6.7) 25(5.9,-6.7) 26(5.9,-5.9) 27(5.9,-5.1) 28(5.9,-4.3) 29(5.9,-3.5) 30(5.9,-2.7) 31(5.9,-1.9) 32(5.9,-1.1) 33(5.9,-0.3) 34(5.9,0.5) 35(5.9,1.3)
  rect 0.4x0.8 smd: 12(-4.8,-7.6) 13(-4,-7.6) 14(-3.2,-7.6) 15(-2.4,-7.6) 16(-1.6,-7.6) 17(-0.8,-7.6) 18(0,-7.6) 19(0.8,-7.6) 20(1.6,-7.6) 21(2.4,-7.6) 22(3.2,-7.6) 23(4,-7.6) 24(4.8,-7.6) 36(4.8,2.2) 37(4,2.2) 38(3.2,2.2) 39(2.4,2.2) 40(1.6,2.2) 41(0.8,2.2) 42(0,2.2) 43(-0.8,2.2) 44(-1.6,2.2) 45(-2.4,2.2) 46(-3.2,2.2) 47(-4,2.2) 48(-4.8,2.2)
  rect 0.6x0.6 smd paste-1 mask+0: 49_1(-1.975,-0.725)
  rect 1.45x1.45 smd: 49_2(0,-0.725) 49_3(1.975,-0.725) 49_4(1.975,-2.7) 49_5(1.975,-4.675) 49_6(0,-4.675) 49_7(-1.975,-4.675) 49_8(-1.975,-2.7) 49_9(0,-2.7)
  rect 0.7x0.7 smd: 50(5.95,2.25) 51(5.95,-7.65) 52(-5.95,-7.65) 53(-5.95,2.25)
  Top Layer region: -1.25,-1.45 -2.7,-1.45 -2.7,-0.6 -2.1,0 -1.25,0
  silkscreen extent -7.35,1.2 6.6,8.3, body extent -6.6,-8.3 6.6,8.3, height 2.55
"FAN_Connector XH" [mm] "FAN_Connector XH 2.54mm"
  rect 1.508x3 hole 1: 1(-1.25,-0.525)
  oval 1.508x3 hole 1: 2(1.25,-0.525)
  silkscreen extent -3.7,-4.8 3.7,1.99, body extent -3.71,-3.89 3.68,1.85, height 7.12
"FERRITE 1206" [mm] "1206"
  rect 1.76x2.06 smd: 1(-1.445,0) 2(1.445,0)
  silkscreen extent -0.24,-0.8 0.24,0.8, body extent -1.5,-0.8 1.5,0.8, height 1.3
Ferrite-0805 [mm]
  rect 1.1x1.4 smd: 1(0.962,0) 2(-0.962,0)
  silkscreen extent -0.14,-0.75 0.14,0.75, body extent -1.02,-0.63 1.02,0.64, height 0.6
FR9886 [mm]
  rect 1.525x0.65 smd: 1(-2.712,1.905) 2(-2.712,0.635) 3(-2.712,-0.635) 4(-2.712,-1.905) 5(2.712,-1.905) 6(2.712,-0.635) 7(2.712,0.635) 8(2.712,1.905)
  silkscreen extent -3.47,-2.45 1.6,2.58, body extent -3,-2.45 3,2.45, height 1.75
HDR1X4H [mm] "Connector; Header; 4 Position; Right Angle"
  rect 1.5x2 hole 0.9: 1(0,0)
  oval 1.5x2 hole 0.9: 2(2.54,0) 3(5.08,0) 4(7.62,0)
  silkscreen extent -1.4,-1.27 8.76,1.27
"Inductor 8*7" [mm] "Inductor, 2-Leads"
  rect 3x7.5 smd: 1(-2.5,0) 2(2.5,0)
  silkscreen extent -0.7,-3.65 0.7,3.65, body extent -3.95,-3.5 3.94,3.5, height 5
"inductor 12*12" [mil]
  rect 124x393.7 smd paste-99999: 1(-190,0) 2(190,0)
  silkscreen extent -246,-246 246,246, body extent -236,-236 236,236, height 315
"inductor 0603" [mm]
  rect 0.85x0.7 smd: 1(-0.775,0) 2(0.775,0)
  silkscreen extent -0.2,-0.4 0.2,0.4, body extent -0.8,-0.4 0.8,0.4, height 0.8
"Inductor SMD 5.3x6.3mm" [mm] "Inductor 4.7µH SMD 5.3*6.3mm"
  round 0.508 on Mech15: 0(0,0)
  rrect25% 2x3 smd: 1(-2,0) 2(2,0)
  silkscreen extent -3.1,-2.6 3.1,2.7, body extent -2.9,-2.6 2.89,2.6, height 4.5
JL7016C [mm] "QFN32 4*4"
  rrect25% 0.71x0.22 smd mask-2539.97: 1(-2.005,1.4) 2(-2.005,1) 3(-2.005,0.6) 4(-2.005,0.2) 5(-2.005,-0.2) 6(-2.005,-0.6) 7(-2.005,-1) 8(-2.005,-1.4) 17(2.005,-1.4) 18(2.005,-1) 19(2.005,-0.6) 20(2.005,-0.2) 21(2.005,0.2) 22(2.005,0.6) 23(2.005,1) 24(2.005,1.4)
  rrect25% 0.22x0.71 smd mask-2539.97: 9(-1.4,-2.005) 10(-1,-2.005) 11(-0.6,-2.005) 12(-0.2,-2.005) 13(0.2,-2.005) 14(0.6,-2.005) 15(1,-2.005) 16(1.4,-2.005) 25(1.4,2.005) 26(1,2.005) 27(0.6,2.005) 28(0.2,2.005) 29(-0.2,2.005) 30(-0.6,2.005) 31(-1,2.005) 32(-1.4,2.005)
  rect 2.5x2.5 smd paste-2: 33(0,0)
  silkscreen extent -2.97,-2 2,2, body extent -2,-2 2,2, height 0.55
JP2_SMD [mil]
  round 10 smd paste-10 mask+3.94: 1(-19.69,0) 2(23.62,0)
  Top Layer region: -9.84,-19.69 49.21,-19.69 49.21,19.69 -9.84,19.69 9.84,0
  Top Layer region: -19.69,19.69 -49.21,19.69 -49.21,-19.69 -19.69,-19.69 0,0
LED-0603-BLUE [mm]
  round 0.254 on Mech15: 0(0,0)
  rrect25% 0.8x0.8 smd: 1(0.85,0) 2(-0.85,0)
  Bottom Layer pour cut-out: -0.5,-0.5 0.5,-0.5 0.5,0.5 -0.5,0.5
  silkscreen extent -1.55,-0.67 1.68,0.67, body extent -0.8,-0.4 0.8,0.4, height 0.75
LM321 [mm] "SOT23-5"
  rrect50% 1.21x0.59 smd: 1(-1.255,0.95) 2(-1.255,0) 3(-1.255,-0.95) 4(1.255,-0.95) 5(1.255,0.95)
  silkscreen extent -2.51,-1.45 0.8,1.45, body extent -1.4,-1.45 1.4,1.45, height 1.43
"M9003 BJT" [mm] "TO255-DPACK"
  rrect25% 2.6x1.06 smd: 1(-4.05,2.286) 3(-4.05,-2.286)
  rrect10% 5.7x5.632 smd paste-4: 2(2.5,0)
  silkscreen extent -6.35,-3.29 4.03,3.29, body extent -4.98,-3.3 4.77,3.3, height 2.3
"pin header1*6" [mm]
  rect 1.24x2 hole 0.89: 1(0,0)
  oval 1.24x2 hole 0.89: 2(2.54,0) 3(5.08,0) 4(7.62,0) 5(10.16,0) 6(12.7,0)
  silkscreen extent -1.82,-1.17 13.77,1.17, body extent -1.27,-1.24 13.97,1.25, height 8.54
"Power jack" [mm]
  oval 2x5 hole 1 slot 3 at 90 deg: 1(-6.5,0) 2(-0.5,0)
  oval 5x2 hole 1 slot 3 at 0 deg: 3(-3.5,4.7)
  silkscreen extent -8.3,-4.5 7.2,4.5, body extent -7.2,-4.57 7.2,4.83, height 11.01
RC4558 [mm]
  rect 1.525x0.65 smd: 1(-2.712,1.905) 2(-2.712,0.635) 3(-2.712,-0.635) 4(-2.712,-1.905) 5(2.712,-1.905) 6(2.712,-0.635) 7(2.712,0.635) 8(2.712,1.905)
  silkscreen extent -3.47,-2.45 1.6,2.58, body extent -3,-2.45 3,2.45, height 1.75
RELAY_SRD-05VDC-SL-C_SRD-05VDC-SL-C(Primary) [mm]
  rect 1.98x1.98 hole 1.32: A1(-6.1,6)
  round 1.98 hole 1.32: A2(-6.1,-6) NC(6.1,6) NO(6.1,-6)
  round 1.935 hole 1.29: COM(-8.1,0)
  silkscreen extent -10.3,-7.75 9.55,7.75, body extent -10.11,-7.5 8.89,7.5, height 16.15
RES-0603 [mm]
  rect 1.1x1 smd: 1(0.85,0) 2(-0.85,0)
  Top Layer pour cut-out: 0.254,0.635 -0.254,0.635 -0.254,-0.635 0.254,-0.635
  silkscreen extent -1.55,-0.66 1.55,0.66, body extent -0.8,-0.42 0.8,0.43, height 0.45
RES-0805 [mm]
  rect 1.1x1.4 smd: 1(0.962,0) 2(-0.962,0)
  silkscreen extent -0.14,-0.75 0.14,0.75, body extent -1.02,-0.63 1.02,0.64, height 0.6
SH_diod [mm]
  rect 2.65x1.75 smd: A(-2.15,0) C(2.15,0)
  silkscreen extent -0.57,-0.7 3.02,1.72, body extent -1.75,-0.89 2.15,0.89, height 1.16
SMAJ3.3A [mm] "JEDEC DO214-AC. SMA"
  round 0.508 on Mech15: 0(0,0)
  rrect25% 2.2x1.7 smd: A(2.1,0) C(-2.1,0)
  silkscreen extent -2.3,-1.4 2.3,1.4, body extent -2.6,-1.3 2.6,1.3, height 2.42
SOLDERJUMPER_ARROW_NOPASTE [mil] "SOLDERJUMPER_ARROW_NOPASTE"
  rrect50% 30x60 smd paste+0 mask+0: 1(-40,0) 2(40,0)
  Top Layer region: -5,29 23,0 -5,-29 45,-29 45,29 -5,29
  Top Layer region: -45,29 -22.5,29 6.5,0 -22.5,-29 -45,-29 -45,29
  body extent -58,-32 58,32, height 150

## Part data
A2: "ESP32 ANTENNA", Package=None, Digi-Key_Part_Number=1532-1001-1-ND, Digi-Key_Purchase_URL=https://www.digikey.com/product-detail/en/proant-ab/PRO-OB-440/1532-1001-1-ND/4895684?utm_source=snapeda&utm_medium=aggregator&utm_campaign=symbol, MF="Proant AB", MP=PRO-OB-440, SnapEDA_Link=https://www.snapeda.com/parts/PRO-OB-440/Proant%20AB/view-part/2307534/?ref=snap
C1 C2 C3 C4 C5 C6 C7 C8 C9 C10 C11 C13 C19 C22 C24 C29 C30 C32 C33 C36 C37 C39 C40 C43 C44 C45 C51 C52 C54 C56 C58 C59 C60 C61 C62 C63 C64 C74 C76 C77 C81 C83 C84 C87 C90 C91 C92 C95 C96 C98 C100 C102 C108 C111 C114 C115 C118 C119 C120 C121 C126 C127 C128 C130 C132 C133 C140 C144 C145 C148 C155 C157 C161 C162 C163 C164 C169 C172: library part "Cap 0603", "Capacitor 0603", LatestRevisionDate=17-Jul-2002, LatestRevisionNote="Re-released for DXP Platform.", Published=8-Jun-2000, Publisher="Altium Limited"
C12 C15 C16 C17 C18 C20 C21 C26 C31 C35 C38 C41 C47 C49 C50 C55 C80 C82 C85 C88 C94 C97 C99 C101 C104 C105 C106 C107 C109 C112 C116 C117 C122 C123 C124 C125 C134 C135 C136 C137 C139 C143 C146 C149 C151 C152 C153 C154 C159 C160 C165 C166 C168 C171: library part "Cap 0805", "Capacitor 0805", LatestRevisionDate=17-Jul-2002, LatestRevisionNote="Re-released for DXP Platform.", Published=8-Jun-2000, Publisher="Altium Limited"
C14 C23 C25 C27 C28 C53 C57 C86 C93 C103 C138 C141 C147 C150 C167 C170: library part "capacitor dip 10*13", "2200ÂµF 50V Aluminum Electrolytic Capacitors Radial, Can 1000 Hrs @ 105Â°C", Package="Radial Nichicon", Availability=Unavailable, MF=Nichicon, MP=UVZ1H222MHD, PRICE=None, SnapEDA_Link=https://www.snapeda.com/parts/UVZ1H222MHD/Nichicon/view-part/468437/?ref=snap
C42: library part "Cap 1206", "Capacitor 1206", LatestRevisionDate=17-Jul-2002, LatestRevisionNote="Re-released for DXP Platform.", Published=8-Jun-2000, Publisher="Altium Limited"
C142: library part "capacitor dip 10*20", "2200ÂµF 50V Aluminum Electrolytic Capacitors Radial, Can 1000 Hrs @ 105Â°C", Package="Radial Nichicon", Availability=Unavailable, MF=Nichicon, MP=UVZ1H222MHD, PRICE=None, SnapEDA_Link=https://www.snapeda.com/parts/UVZ1H222MHD/Nichicon/view-part/468437/?ref=snap
D1 D2 D4: "Shotkey diod SOD-123", Package="SOD-523 NXP Semiconductors", Arrow_Electronics-Purchase-URL=https://snapeda.com/shop?store=Arrow+Electronics&id=143287, Availability=Unavailable, MF="Nexperia USA", MP=BAS716, PRICE=None, SnapEDA_Link=https://www.snapeda.com/parts/BAS716/Nexperia%20USA%20Inc./view-part/143287/?ref=snap
D3: library part 1N4148_SOD123, "SOD-123 Package", Package=None, Availability=Unavailable, MF="ROHM Semiconductor", MP=EDZV12B, PRICE=None, SnapEDA_Link=https://www.snapeda.com/parts/EDZV12B/EMI/view-part/4479349/?ref=snap
D5 D6 D7 D8 U3: Package=None, Availability=Unavailable, PRICE=None
  D5 D6 D7 D8: MF="ON Semiconductor", MP=SS34, SnapEDA_Link=https://www.snapeda.com/parts/SS34/ON%20Semiconductor/view-part/4479478/?ref=snap
  U3: MF="{'manufacturer': u'Espressif Systems'}", MP=ESP32-C3-MINI-1-N4
IC2: "Integrated Circuit SOIC 8", Manufacturer_Name="Texas Instruments", Mouser Part Number=595-RC4558DR, Arrow Part Number=RC4558DR, Arrow Price/Stock=https://www.arrow.com/en/products/rc4558dr/texas-instruments, Datasheet Link=http://www.ti.com/lit/gpn/rc4558, Height=1.75mm, Manufacturer_Part_Number=RC4558DR, Mouser Price/Stock=https://www.mouser.co.uk/ProductDetail/Texas-Instruments/RC4558DR?qs=DXdcjUGny5OhrzskaZRdew%3D%3D
J1: "2.0 x 6.5 mm, 2.5 A, Horizontal, Through Hole, Tapered Pins, Dc Power Jack Connector", Package=None, Availability=Unavailable, CUI_purchase_URL=https://www.cuidevices.com/product/interconnect/connectors/dc-power-connectors/jacks/pj-102a?utm_source=snapeda.com&utm_medium=referral&utm_campaign=snapedaBOM, MF="CUI Devices", MP=PJ-102A, PRICE=None, SnapEDA_Link=https://www.snapeda.com/parts/PJ-102A/CUI%20Devices/view-part/55545/?ref=snap
J3: library part "pin header 06", "Pin Connector 06 MODII HDR SRST B/A .100CL 6 POS", Package=None, Availability=Unavailable, MF="TE Connectivity", MP=5-146283-6, PRICE=None, SnapEDA_Link=https://www.snapeda.com/parts/5-146283-6/TE%20Connectivity%20AMP%20Connectors/view-part/?ref=snap, TE_purchase_URL=https://www.te.com/usa-en/product-5-146283-6.html?te_bu=Cor&te_type=disp&te_campaign=seda_glo_cor-seda-global-disp-prtnr-fy19-seda-model-bom-cta_sma-317_1&elqCampaignId=32493
J4 J6: "SMD Solder JUMPERSolder the two pads together to create a connection, or remove the solder to break it.REFLOW - Use this footprint for solder paste and reflow ovens.WAVE - Use this footprint for hand-soldering (larger pads). CLOSED - Has a trace between the two pads to ensure it is closed by default.  The trace needs to be cut to disable the jumper, and can be closed again by creating a solder bridge between the two pads.", BOM=EXCLUDE, DeviceSetName=SOLDERJUMPER, GateName_1=1, LibraryName=microbuilder, SymbolName_1=SOLDERJUMPER
J7 J8 J9 P1 P3 P7 P8 P9 P10: library part CONN-Phoenix-5.08, "Phoenix Connector 5.08", LatestRevisionDate=17-Jul-2002, LatestRevisionNote="Re-released for DXP Platform.", Publisher="Altium Limited"
K1 K2 K3 K4: library part RELAY-SRD, "5V Trigger Relay Module For Arduino And Raspberry Pi 5V Trigger Relay Module For Arduino And Raspberry Pi", Package=None, Availability=Unavailable, MF="Songle Relay", MP=SRD-05VDC-SL-C, PRICE=None, SnapEDA_Link=https://www.snapeda.com/parts/SRD-05VDC-SL-C/Songle%20Relay/view-part/1029484/?ref=snap
L1 L12: library part "Ferrite _0805", "BLM Series 0805 330 Ohm 400 mA 0.58 Ohm DCR Surface Mount Ferrite Bead", Package="0603 Murata", Availability=Unavailable, MF=Murata, MP=BLM18BB331SN1D, PRICE=None, SnapEDA_Link=https://www.snapeda.com/parts/BLM18BB331SN1D/Murata%20Electronics%20North%20America/view-part/?ref=snap
L2 L3 L4 L5 L6 L7 L11 L13 L14 L15 L16 L17 L18 L19 L20 L21 L22 L23: library part "INDUCTOR 12*12", "Inductor round 12*12", Package="Nonstandard Eaton", Availability=Unavailable, MF=Eaton, MP=DR127-330-R, PRICE=None, SnapEDA_Link=https://www.snapeda.com/parts/DR127-330-R/Eaton/view-part/?ref=snap
L8 L10: library part "INDUCTOR 8*7", "Inductor round 8*7", Package="Nonstandard Eaton", Availability=Unavailable, MF=Eaton, MP=DR127-330-R, PRICE=None, SnapEDA_Link=https://www.snapeda.com/parts/DR127-330-R/Eaton/view-part/?ref=snap
L9: library part "INDUCTOR 5.3*6.3", "Inductor round 5.3*6.3", Package="Nonstandard Eaton", Availability=Unavailable, MF=Eaton, MP=DR127-330-R, PRICE=None, SnapEDA_Link=https://www.snapeda.com/parts/DR127-330-R/Eaton/view-part/?ref=snap
L24 L25 L26 L27: library part "Ferrite _1206", "BLM Series 1206 330 Ohm 400 mA 0.58 Ohm DCR Surface Mount Ferrite Bead", Package="0603 Murata", Availability=Unavailable, MF=Murata, MP=BLM18BB331SN1D, PRICE=None, SnapEDA_Link=https://www.snapeda.com/parts/BLM18BB331SN1D/Murata%20Electronics%20North%20America/view-part/?ref=snap
L28 L29: library part INDUCTOR_SMD, "Inductor smd", Package="Nonstandard Eaton", Availability=Unavailable, MF=Eaton, MP=DR127-330-R, PRICE=None, SnapEDA_Link=https://www.snapeda.com/parts/DR127-330-R/Eaton/view-part/?ref=snap
LD6: library part LED_blue, "LED, Blue, 0603", Manuf_1=everlight, Manuf_Part_1=19-213-R6C-AP1Q2B/3T, ECCN_US/EU=EAR99/NEC, Order=19-213-R6C-AP1Q2B/3T
P2: library part "Header 4", "Header, 4-Pin", LatestRevisionDate=17-Jul-2002, LatestRevisionNote="Re-released for DXP Platform.", Publisher="Altium Limited"
P4: library part "CONN-Phoenix-3.81 3Pin", "Phoenix Connector 3.81", LatestRevisionDate=17-Jul-2002, LatestRevisionNote="Re-released for DXP Platform.", Publisher="Altium Limited"
P5 P11 P12: library part CONN-Phoenix-3.81_1, "Phoenix Connector 3.81", LatestRevisionDate=17-Jul-2002, LatestRevisionNote="Re-released for DXP Platform.", Publisher="Altium Limited"
P6: library part "pin header 1X4", "Header, 4-Pin", LatestRevisionDate=17-Jul-2002, LatestRevisionNote="Re-released for DXP Platform.", Publisher="Altium Limited"
Q5: library part "SS8050-G BJT_ Transistor", "Bipolar _BJT_ Transistor NPN 25V 1.5A 100MHz 300mW Surface Mount SOT-23", Package="TO-236 Comchip", Availability=Unavailable, MF="Comchip Technology", MP=SS8050-G, PRICE=None, SnapEDA_Link=https://www.snapeda.com/parts/SS8050-G/Comchip%20Technology/view-part/809142/?ref=snap
Q7 Q9 Q10 Q11 Q12: "NPN General Purpose Amplifier BJT", ComponentLink1Description="Manufacturer Link", ComponentLink1URL=http://www.fairchildsemi.com/, ComponentLink2Description=Datasheet, ComponentLink2URL=http://www.fairchildsemi.com/ds/2N%2F2N3904.pdf, DatasheetVersion=1997, LatestRevisionDate=15-Jan-2003, LatestRevisionNote="PCB Footprint 'BCY-W3/D4.7' replaced", PackageDescription="TO, Flat Index; 3 In-Line, Axial Leads; Body Dia. 4.5mm; Leads 0.51 x 0.48 mm (max)", PackageReference=TO-92A, PackageVersion=Sep-1998, Published=8-Jun-2000, Publisher="Altium Limited"
Q8: library part M9003B, "Bipolar (BJT) Transistor NPN TO-252, (D-Pak)", Package="TO-252-3 Diodes Inc.", Check_prices=https://www.snapeda.com/parts/2DB1184Q-13/Diodes+Inc./view-part/?ref=eda, MF="Diodes Inc.", MP=2DB1184Q-13, SnapEDA_Link=https://www.snapeda.com/parts/2DB1184Q-13/Diodes+Inc./view-part/?ref=snap
R1 R2 R3 R4 R5 R6 R7 R8 R9 R10 R11 R12 R13 R14 R15 R16 R17 R18 R19 R20 R21 R22 R23 R24 R25 R29 R30 R31 R32 R33 R34 R35 R36 R37 R40 R46 R51 R53 R54 R55 R56 R58 R59 R60 R61 R62 R63 R64 R65 R66 R67 R69 R70 R71 R72 R73 R74 R75 R76 R77 R78 R79 R80 R81 R82 R83 R84 R85 R86 R87 R88 R89 R90 R91 R92 R93 R94 R95 R96 R97 R98 R99 R100 R101 R102 R103: library part "Res 0603", "Resistor 0603", LatestRevisionDate=29-May-2009, LatestRevisionNote="IPC-7351 Footprint Added.", PackageDescription="Chip Resistor", PackageReference=J1-0603, Published=8-Jun-2000, Publisher="Altium Limited"
R68: library part "Res 0805", "resistor 0805"
SB1: "Circuit Breaker", Revision="July-2002: Re-released for DXP Platform.", Solder=NO
T1: library part SMAJ3.3A, "one side TVS Diode", Package=None, Availability=Unavailable, MF="ROHM Semiconductor", MP=EDZV12B, PRICE=None, SnapEDA_Link=https://www.snapeda.com/parts/EDZV12B/EMI/view-part/4479349/?ref=snap
U1: "BlE Chip"
U2 U12: "Linear Voltage Regulator IC 1 Output 100mA SOT-89-3", Package="SOT-89-3 Texas Instruments", Availability=Unavailable, MF="Texas Instruments", MP=UA78L05CPK, PRICE=None, SnapEDA_Link=https://www.snapeda.com/parts/UA78L05CPK/Texas%20Instruments/view-part/512891/?ref=snap
U4: library part 78L05, "Linear Voltage Regulator IC 1 Output 100mA SOT-89-3", Package="SOT-89-3 Texas Instruments", Availability=Unavailable, MF="Texas Instruments", MP=UA78L05CPK, PRICE=None, SnapEDA_Link=https://www.snapeda.com/parts/UA78L05CPK/Texas%20Instruments/view-part/512891/?ref=snap
U5 U7 U13 U14 U15 U16: "AB/D 2X40W BTL & 80W PBTL ESOP16", Arrow Part Number=CS8679E, Manufacturer_Name=Chipstar, Mouser Part Number=511-TDA7491HV13TR, Arrow Price/Stock=https://www.arrow.com/en/products/tda7491hv13tr/stmicroelectronics, Height=2.47mm, Manufacturer_Part_Number=CS8679E, Mouser Price/Stock=https://www.mouser.com/Search/Refine.aspx?Keyword=511-TDA7491HV13TR
U6: "FAN 12V 40*40*10mm . XH Connector", Manufacturer Part=?, Contributor=novasilisko, spicePre=U, timeStamp=1467237407
U8: "Regulator SOP-8", Manufacturer_Name=Fitipower, Manufacturer_Part_Number=FR9886SOGTR, Datasheet Link=https://www.insidegadgets.com/wp-content/uploads/2015/03/FR9886.pdf, Height=1.75mm
U9: "Operational Amplifier 5-SOT-23", Package="SOT-23-5 Texas Instruments", Digi-Key_Part_Number=296-13033-1-ND, Digi-Key_Purchase_URL=https://www.digikey.de/product-detail/en/texas-instruments/OPA354AIDBVT/296-13033-1-ND/480149?utm_source=snapeda&utm_medium=aggregator&utm_campaign=symbol, MF="Texas Instruments", MP=OPA354AIDBVT, SnapEDA_Link=https://www.snapeda.com/parts/OPA354AIDBVT/Texas%20Instruments/view-part/?ref=snap
U11: library part XL1509-12E, "Regulator SOP-8", Manufacturer_Name=Fitipower, Manufacturer_Part_Number=FR9886SOGTR, Datasheet Link=https://www.insidegadgets.com/wp-content/uploads/2015/03/FR9886.pdf, Height=1.75mm
U17 U18 U19 U20: library part EL817(S1)(A)(TU)-G, "Optoisoltr 5kv Transistor 4-Smd", Package=None, Availability=Unavailable, MP=EL817(S1)(A)(TU)-G, PRICE=None
Y1: library part "crystal b", "13MHz Â±30ppm Crystal 20pF 60 Ohms HC-49/US  ECS-130-20-3X-TR", Package="HC49/US ECS International", Availability=Warning, Check_prices=https://www.snapeda.com/parts/ECS-130-20-3X-TR/ECS%20Inc./view-part/2459108/?ref=eda, MF="ECS Inc.", MP=ECS-130-20-3X-TR, PRICE=None, Purchase-URL=https://pricing.snapeda.com/search/part/ECS-130-20-3X-TR/?ref=eda, SnapEDA_Link=https://www.snapeda.com/parts/ECS-130-20-3X-TR/ECS%20Inc./view-part/2459108/?ref=snap

## Free pads (board coordinates)
  oval 3x2.5 hole 1.5: 4(164.211,162.179)

## Via types
v1: diameter 0.8, hole 0.4, Top Layer to Bottom Layer, 560 vias

## Nets (pads, with @x,y where several pads share a name; then routed paths per layer and width w, separated by ;. In a path a pad name is that pad's centre, name@x,y a point inside that pad or via, vN(x,y) a via of type N, cw(c..) or ccw(c..) an arc to the next point about the centre after c; other vN are vias at no path point)
3.3V: C57.1 C90.1 J3.1 L8.1 R11.1 R15.1 R18.2 R19.1 R25.1 R31.2 U3.3 | length 204.8
  Top Layer w0.2: v1(162.306,186.69) 167.767,186.69 169.164,188.087 169.164,201.725 168.744,202.145 R25.1@167.005,202.145
  Top Layer w0.4: J3.1@141.478,181.102 140.081,181.102 139.192,180.213 139.192,177.927 139.954,177.165 145.415,177.165 146.85,175.73 146.85,173.1 R18.2@146.597,172.847 R19.1@146.597,170.942
  Top Layer w0.7: R11.1@159.346,186.69 v1(162.306,186.69) ; 161.356,186.28 161.356,184.744 161.324,184.712 161.457,184.579 U3.3@161.457,181.376 ; L8.1@163.703,65.278 162.758,66.223 C90.1@162.758,73.044 162.822,73.108 162.822,75.952 R31.2@162.885,76.016 165.805,76.016 166.44,76.651 C57.1@166.44,78.886
  Bottom Layer w0.4: J3.1@141.478,181.102 141.478,182.753 143.002,184.277 163.068,184.277
  Bottom Layer w0.7: v1(162.306,186.69) 162.941,186.69 163.068,186.563 163.068,184.277 163.068,167.161 163.478,166.751 167.386,166.751 168.529,165.608 168.529,90.678 166.44,88.589 C57.1@166.44,78.886
5V_D: C82.2 C83.2 P6.1 U12.1 | length 4.1
  Top Layer w0.7: U12.1@144.253,65.721 144.282,65.75 144.282,67.789 C83.2@144.311,67.818 144.303,67.826 144.303,69.826 C82.2@144.296,69.833
12V: C7.2 C9.1 C59.2 C60.2 IC2.8 L9.1 L12.2 R8.2 | length 127.7
  Top Layer w0.4: v1(98.298,130.048) 98.298,143.383 100.223,145.308 v1(102.999,145.308) ; v1(102.997,147.511) 107.403,147.511 108.839,148.947 108.839,160.274 115.443,166.878 115.443,178.435 116.459,179.451 122.809,179.451 123.698,180.34 123.698,187.579 125.095,188.976 131.318,188.976 131.936,189.594 L9.1@131.936,192.678 ; C60.2@128.181,196.508 C59.2@129.959,196.508 131.843,196.508 L12.2@131.862,196.488 L9.1@131.862,192.751
  Top Layer w0.7: C7.2@72.898,125.437 77.023,125.437 77.062,125.476 v1(77.089,125.476) 77.108,125.495 77.108,126.086 77.133,126.111 IC2.8@77.171,126.111 ; R8.2@88.392,129.96 88.412,129.94 90.151,129.94 v1(90.17,129.921)
  Bottom Layer w0.4: v1(90.17,129.921) 90.233,129.984 98.234,129.984 v1(98.298,130.048) ; v1(102.999,145.308) v1@102.998,147.51
  Bottom Layer w0.7: v1(77.089,125.476) 89.76,125.476 90.17,125.886 v1(90.17,129.921)